# Altium PCB PCB1.PcbDoc
Units mil, origin at the board's own origin, x right, y up, seen from the top; angles counter-clockwise.
Board outline 6000 x 4000 mil, 2 copper layers (Top Layer, Bottom Layer); 12 components, 7 nets, 29 pads, 0 vias.
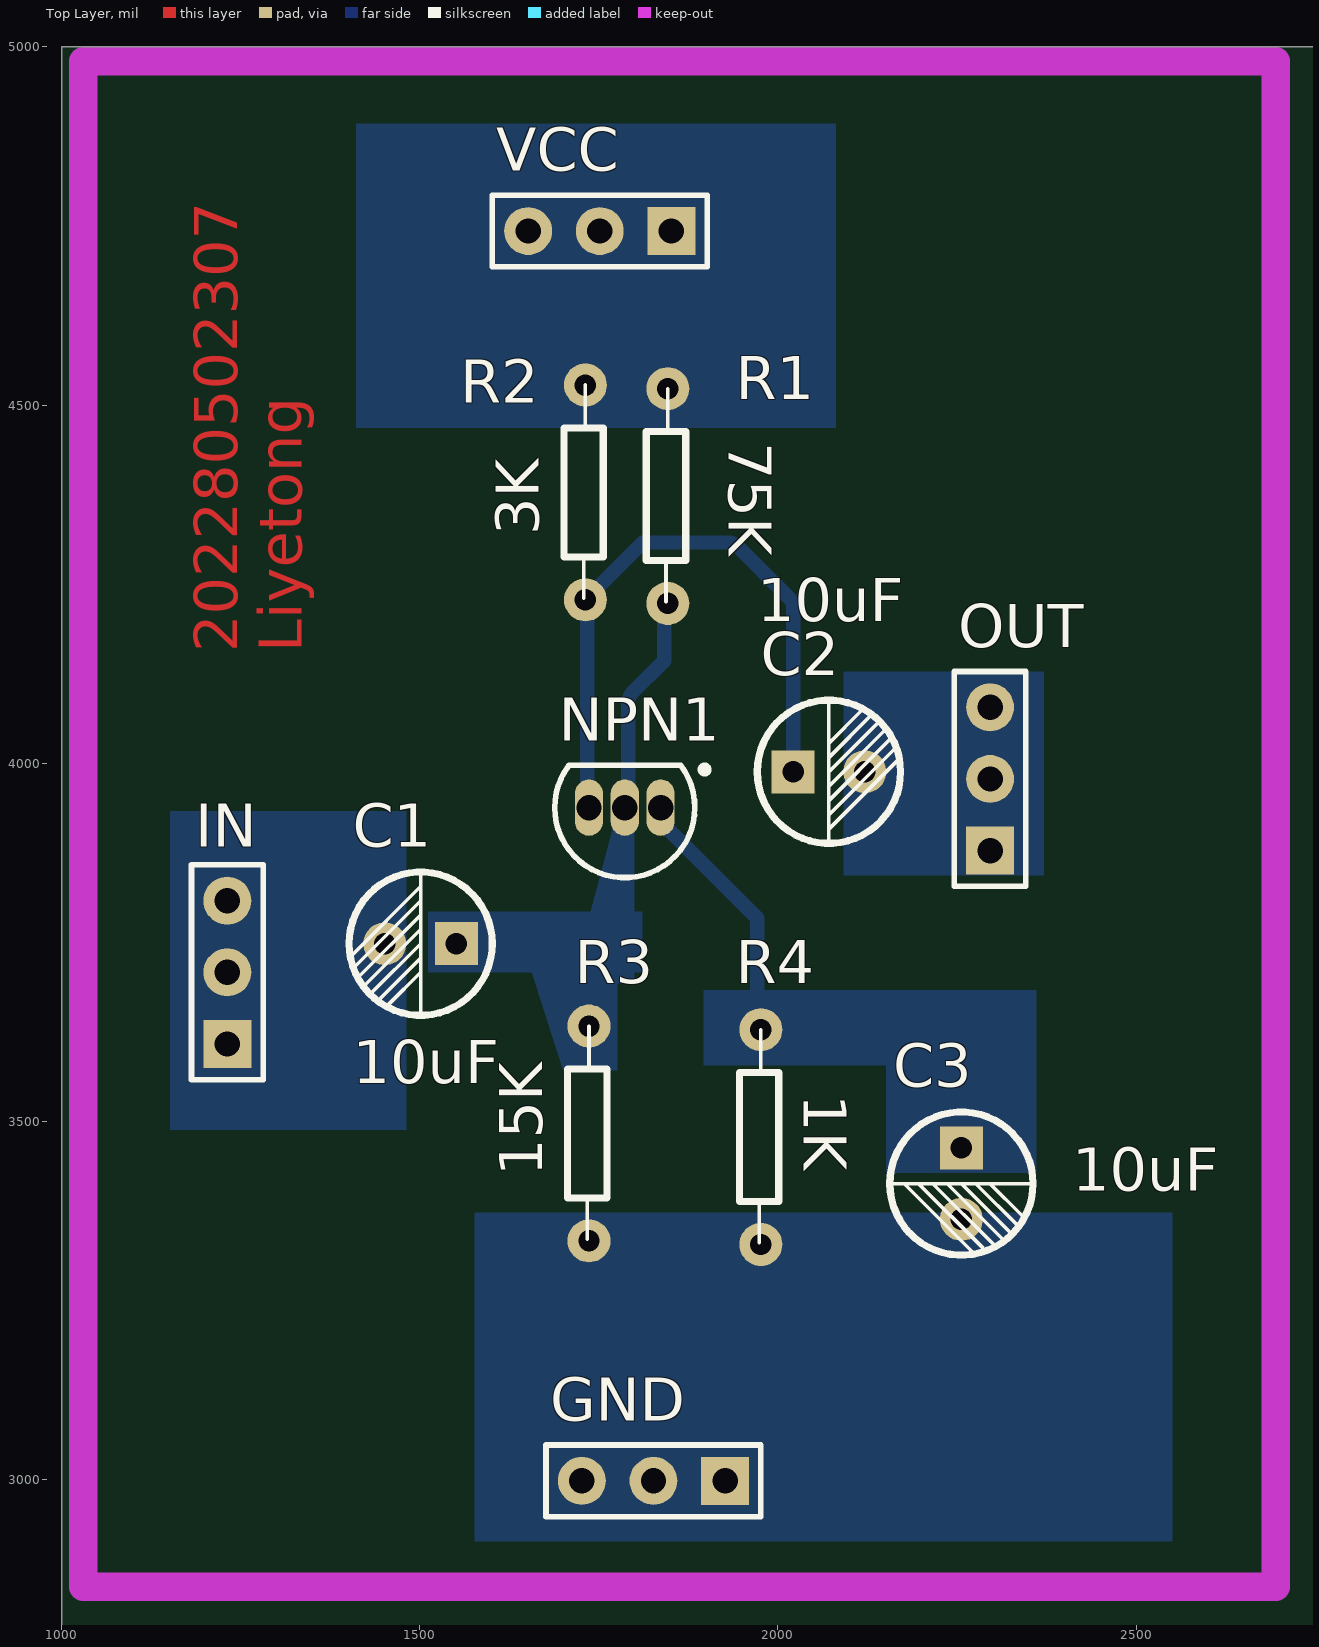
[diagram p0: Top Layer view]
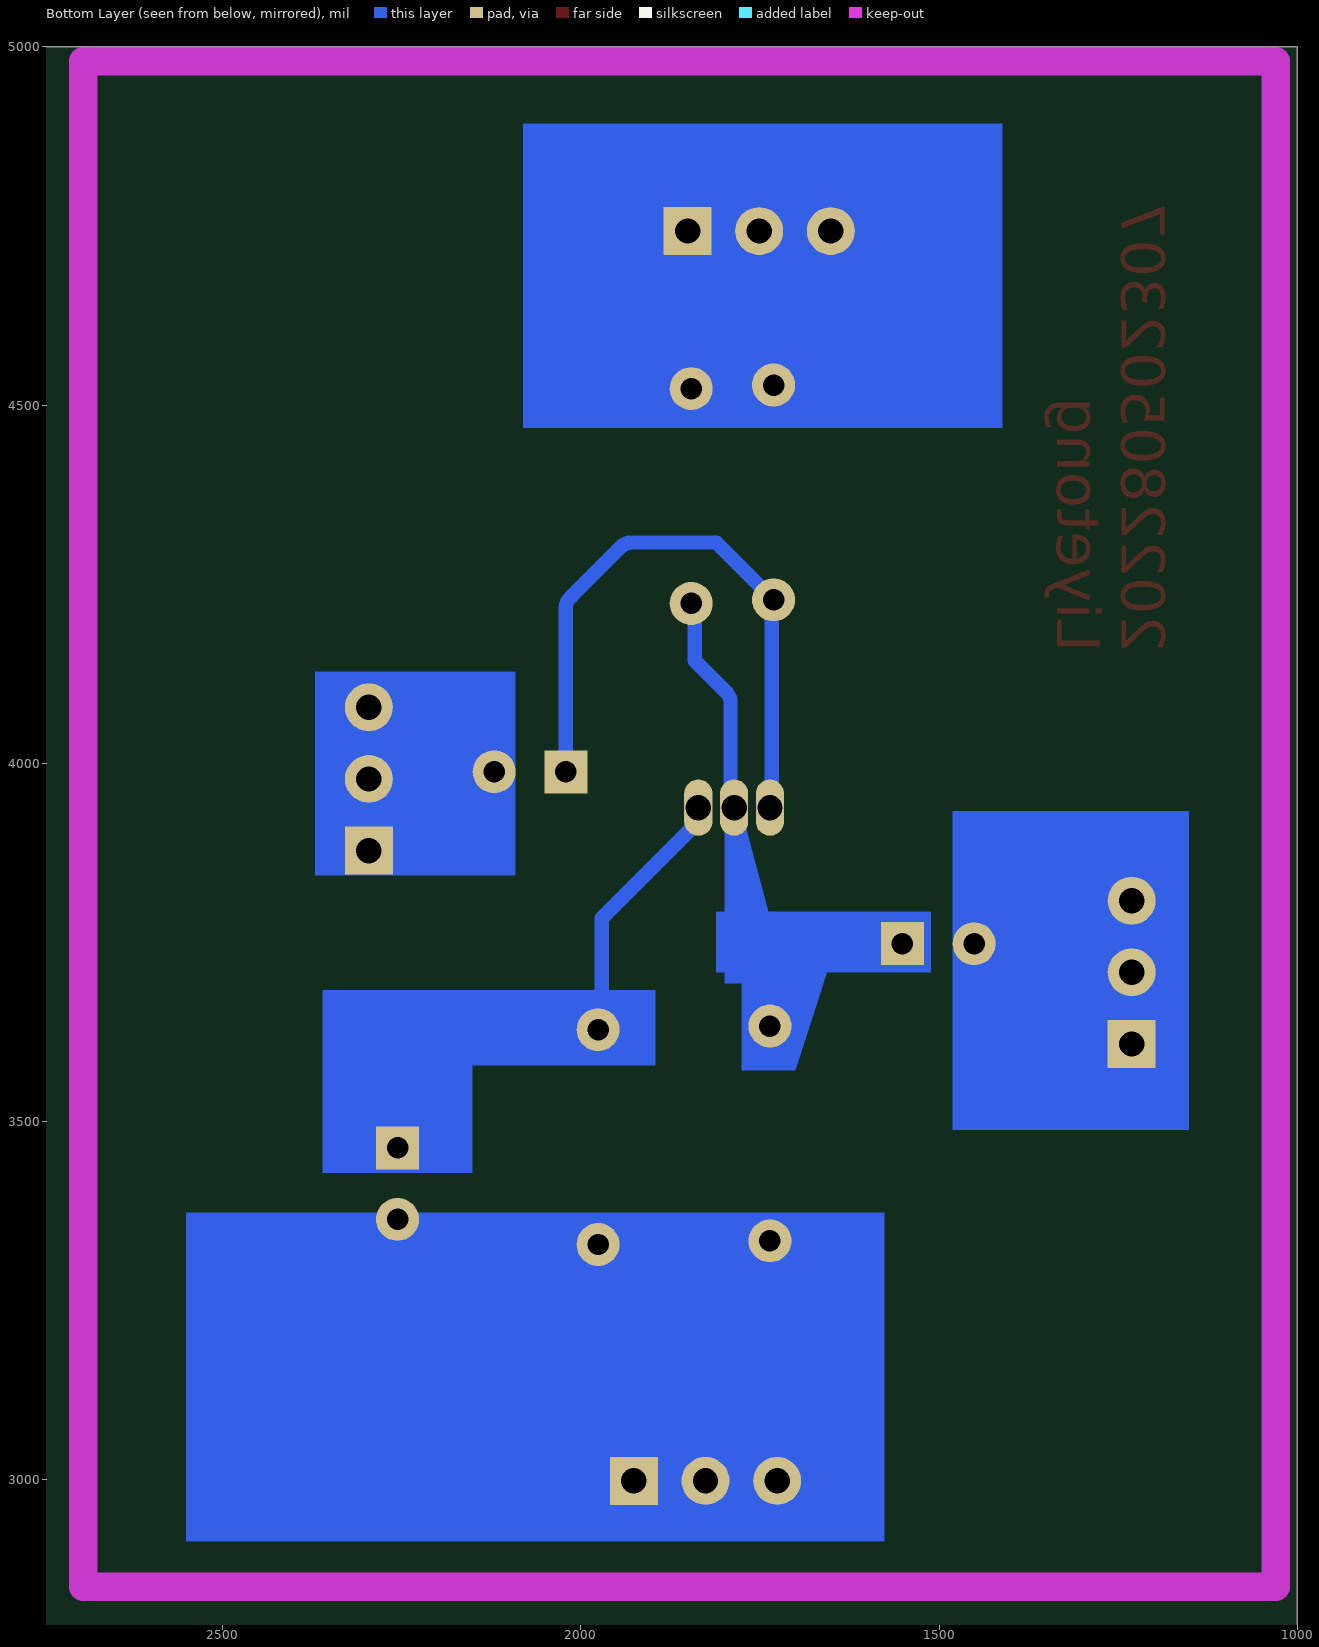
[diagram p1: Bottom Layer view, seen from below]

## Layer stack, top to bottom
Top Solder: solder mask 0.4, Solder Resist, Dk 3.5
Top Layer: signal copper 1.4
Dielectric 1: dielectric 12.6, FR-4, Dk 4.8
Bottom Layer: signal copper 1.4
Bottom Solder: solder mask 0.4, Solder Resist, Dk 3.5

## Board outline
1000,1000 7000,1000 7000,5000 1000,5000

## Design rules (kind name [scope] priority, off if disabled: settings)
Clearance [All] p1: gap=10 ignorepadtopadclearanceinfootprint=FALSE except(0: Arc-Hole Track-Hole SMDPad-Hole THPad-Hole Via-Hole Fill-Hole Poly-Hole Region-Hole Text-Hole)
PolygonConnect [All] p1: connectstyle=Relief reliefconductorwidth=10 reliefentries=4 polygonreliefangle="90 Angle" airgapwidth=10
RoutingVias [All] p1: holewidth=28 width=50 viastyle="Through Hole" minholewidth=28 minwidth=50 maxholewidth=28 maxwidth=50
SolderMaskExpansion [All] p1: expansion=4 istentingtop=FALSE
Width [All] p1: maxlimit=99 minlimit=15 preferedwidth=20 toplayer_maxwidth=15 toplayer_prefwidth=15 bottomlayer_minwidth=20 minimp=50.000000 maximp=50.000000 favimp=50.000000
30 further rules are at their usual default settings.

## Components (designator, comment, footprint, x,y, rotation, side; value= is the part's Value field where it differs from the comment)
C1 "10uF" CAP-1uF 1551.17,3747.91 r180 top value=10pF
C2 "10uF" CAP-1uF 2021.17,3987.91 r0 top value=10pF
C3 "10uF" CAP-1uF 2256.17,3462.92 r270 top value=10pF
GND "CON3" SIP3 1826.17,2997.91 r180 top
IN "CON3" SIP3 1231.17,3707.91 r90 top
NPN1 "2N3904" TO-92A 1786.17,3937.91 r90 top (schematic designator V1)
OUT "CON3" SIP3 2296.17,3977.91 r90 top
R1 "75K" RES-1/2W-1 1846.17,4222.91 r90 top
R2 "3K" RES-1/2W-1 1731.17,4227.91 r90 top
R3 "15K" RES-1/2W-1 1736.17,3332.91 r90 top value=1K
R4 "1K" RES-1/2W-1 1976.17,3327.91 r90 top
VCC "CON3" SIP3 1751.17,4742.91 r180 top

## Footprints (in the part's own frame and the unit in brackets; to place one, negate y for a bottom-side part, rotate by r counter-clockwise, add the part's x,y. Pads: shape width x height; smd on the part's side, far side on the other; paste and mask are expansions set on the pad)
CAP-1uF [mil]
  rect 60x60 hole 30: 1(0,0)
  round 60 hole 30: 2(100,0)
  silkscreen extent -50,-100 150,100, body extent -48,-98 149,98, height 435
RES-1/2W-1 [mil]
  round 60 hole 30: 1(0,0) 2(300,0)
  silkscreen extent 2,-25 300,30, body extent -37,-46 335,45, height 91
SIP3 [mm]
  rect 1.7x1.7 hole 0.9: 1(-2.54,0)
  round 1.7 hole 0.9: 2(0,0) 3(2.54,0)
  silkscreen extent -3.81,-1.27 3.81,1.27, body extent -3.81,-1.27 3.81,1.27, height 8.5
TO-92A [mm] "TO, Flat Index; 3 In-Line, Axial Leads; Body Dia. 4.5mm; Leads 0.51 x 0.48 mm (max)"
  oval 2x1 hole 0.9: 1(0,-1.27) 2(0,0) 3(0,1.27)
  silkscreen extent -2.48,-2.96 1.5,2.48, body extent -2.48,-2.5 1.5,2.5, height 6.86

## Part data
C1 C2 C3: library part Cap, "Capacitor", LatestRevisionDate=17-Jul-2002, LatestRevisionNote="Re-released for DXP Platform.", PackageDescription="Radial Cap, Thru-Hole; 2 Leads; 0.3 in Pin Spacing", PackageReference=RAD-0.3, Published=8-Jun-2000, Publisher="Altium Limited"
NPN1: "NPN General Purpose Amplifier", ComponentLink1Description="Manufacturer Link", ComponentLink1URL=http://www.fairchildsemi.com/, ComponentLink2Description=Datasheet, ComponentLink2URL=http://www.fairchildsemi.com/ds/2N%2F2N3904.pdf, DatasheetVersion=1997, LatestRevisionDate=15-Jan-2003, LatestRevisionNote="PCB Footprint 'BCY-W3/D4.7' replaced", PackageDescription="TO, Flat Index; 3 In-Line, Axial Leads; Body Dia. 4.5mm; Leads 0.51 x 0.48 mm (max)", PackageReference=TO-92A, PackageVersion=Sep-1998, Published=8-Jun-2000, Publisher="Altium Limited"
R1 R2 R3 R4: library part Res2, "Resistor", LatestRevisionDate=17-Jul-2002, LatestRevisionNote="Re-released for DXP Platform.", PackageDescription="Axial Device, Thru-Hole; 2 Leads; 0.4 in Pin Spacing", PackageReference=AXIAL-0.4, Published=8-Jun-2000, Publisher="Altium Limited"

## Nets (pads, with @x,y where several pads share a name; then routed paths per layer and width w, separated by ;. In a path a pad name is that pad's centre, name@x,y a point inside that pad or via, vN(x,y) a via of type N, cw(c..) or ccw(c..) an arc to the next point about the centre after c; other vN are vias at no path point)
GND: C3.2 GND.1 GND.2 GND.3 R3.1 R4.1
NetC1_1: C1.1 NPN1.2 R1.1 R3.2 | length 334.9
  Bottom Layer w20: NPN1.2 1786.17,3942.91 1789.4,3942.91 ccw(c1771.17,3951.14) 1791.17,3951.08 1791.17,4084.63 cw(c1811.17,4084.63) 1797.03,4098.77 1841.17,4142.91 1841.17,4227.91 R1.1@1846.17,4232.91
  Bottom Layer w30: 1581.17,3762.91 1581.17,3756.91 1587.17,3762.91
NetC1_2: C1.2 IN.1 IN.2 IN.3
NetC2_1: C2.1 NPN1.3 R2.1 | length 884.9
  Bottom Layer w20: NPN1.3 1733.67,3940.41 1733.67,4225.41 R2.1 1811.17,4307.91 1929.95,4307.91 cw(c1929.95,4287.91) 1944.14,4302.01 2013.12,4233.02 2015.35,4230.79 cw(c2001.17,4216.69) 2021.17,4216.75 2021.17,4216.69 C2.1
NetC2_2: C2.2 OUT.1 OUT.2 OUT.3
NetC3_1: C3.1 NPN1.1 R4.2 | length 368
  Bottom Layer w20: NPN1.1 1836.17,3918.23 1971.17,3783.23 1971.17,3632.91 R4.2
VCC: R1.2 R2.2 VCC.1 VCC.2 VCC.3

## Keep-outs
Keep-Out Layer:
  lines w40: 1030,2850 2695,2850 2695,4980 1030,4980 1030,2850

## Other copper
Top Layer:
  text "202280502307 / Liyetong" at 1335,4155 h60 r90
Bottom Layer:
  rectangle net NetC2_2: 2091.17,3842.91 2371.17,4127.91
  rectangle net NetC3_1: 2151.17,3427.91 2361.17,3602.91
  rectangle net NetC1_1: 1511.17,3707.91 1811.17,3792.91
  rectangle net NetC3_1: 1896.17,3577.91 2361.17,3682.91
  rectangle net GND: 1576.17,2912.91 2551.17,3372.91
  rectangle net NetC1_2: 1151.17,3487.91 1481.17,3932.91
  rectangle net VCC: 1411.17,4467.91 2081.17,4892.91
  region net NetC1_1: 1711.77,3692.91 1799.23,3692.91 1799.23,3912.91 1770.57,3912.91
  region net NetC1_1: 1641.78,3754.75 1775.31,3754.75 1775.31,3571.08 1700.56,3571.08